# Altium PCB DAQ_PCB.PcbDoc
Units mil, origin at the board's own origin, x right, y up, seen from the top; angles counter-clockwise.
Board outline 5500 x 3700 mil, 2 copper layers (Top Layer, Bottom Layer); 16 components, 53 nets, 188 pads, 11 vias.
Unrouted connection lines stored in the file: 1.
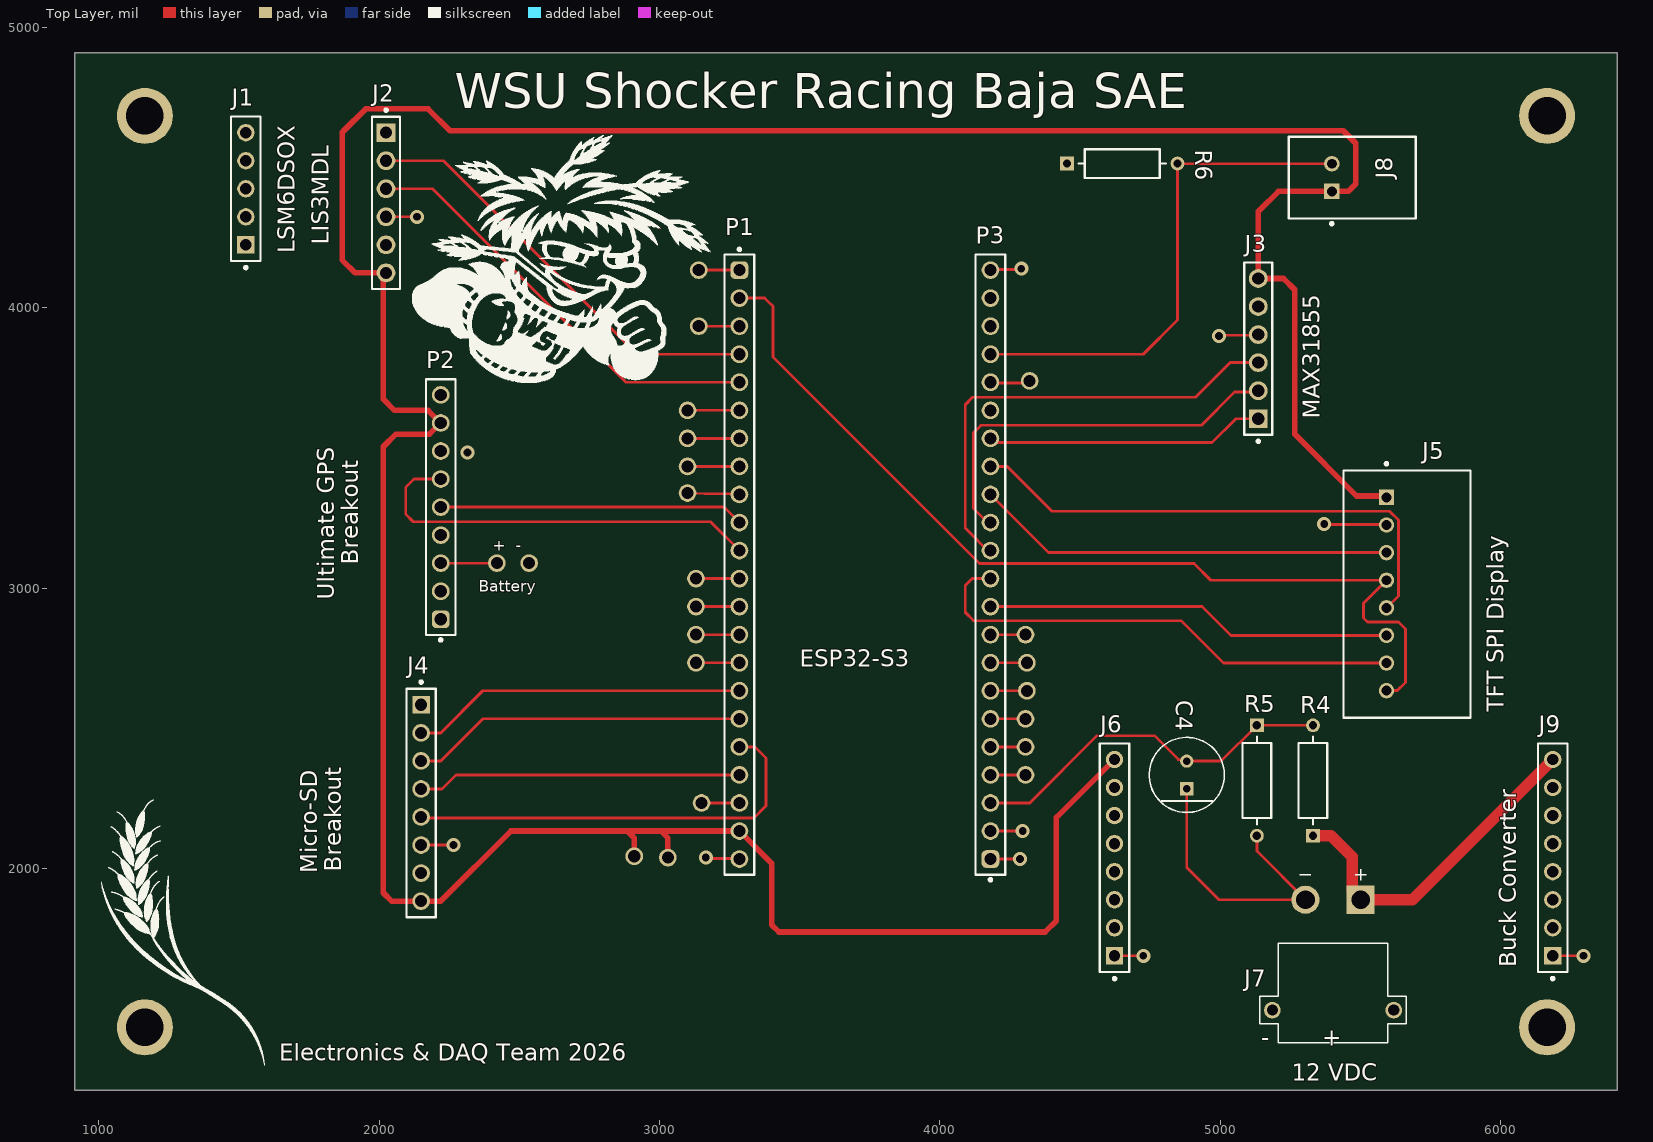
[diagram p0: Top Layer view]
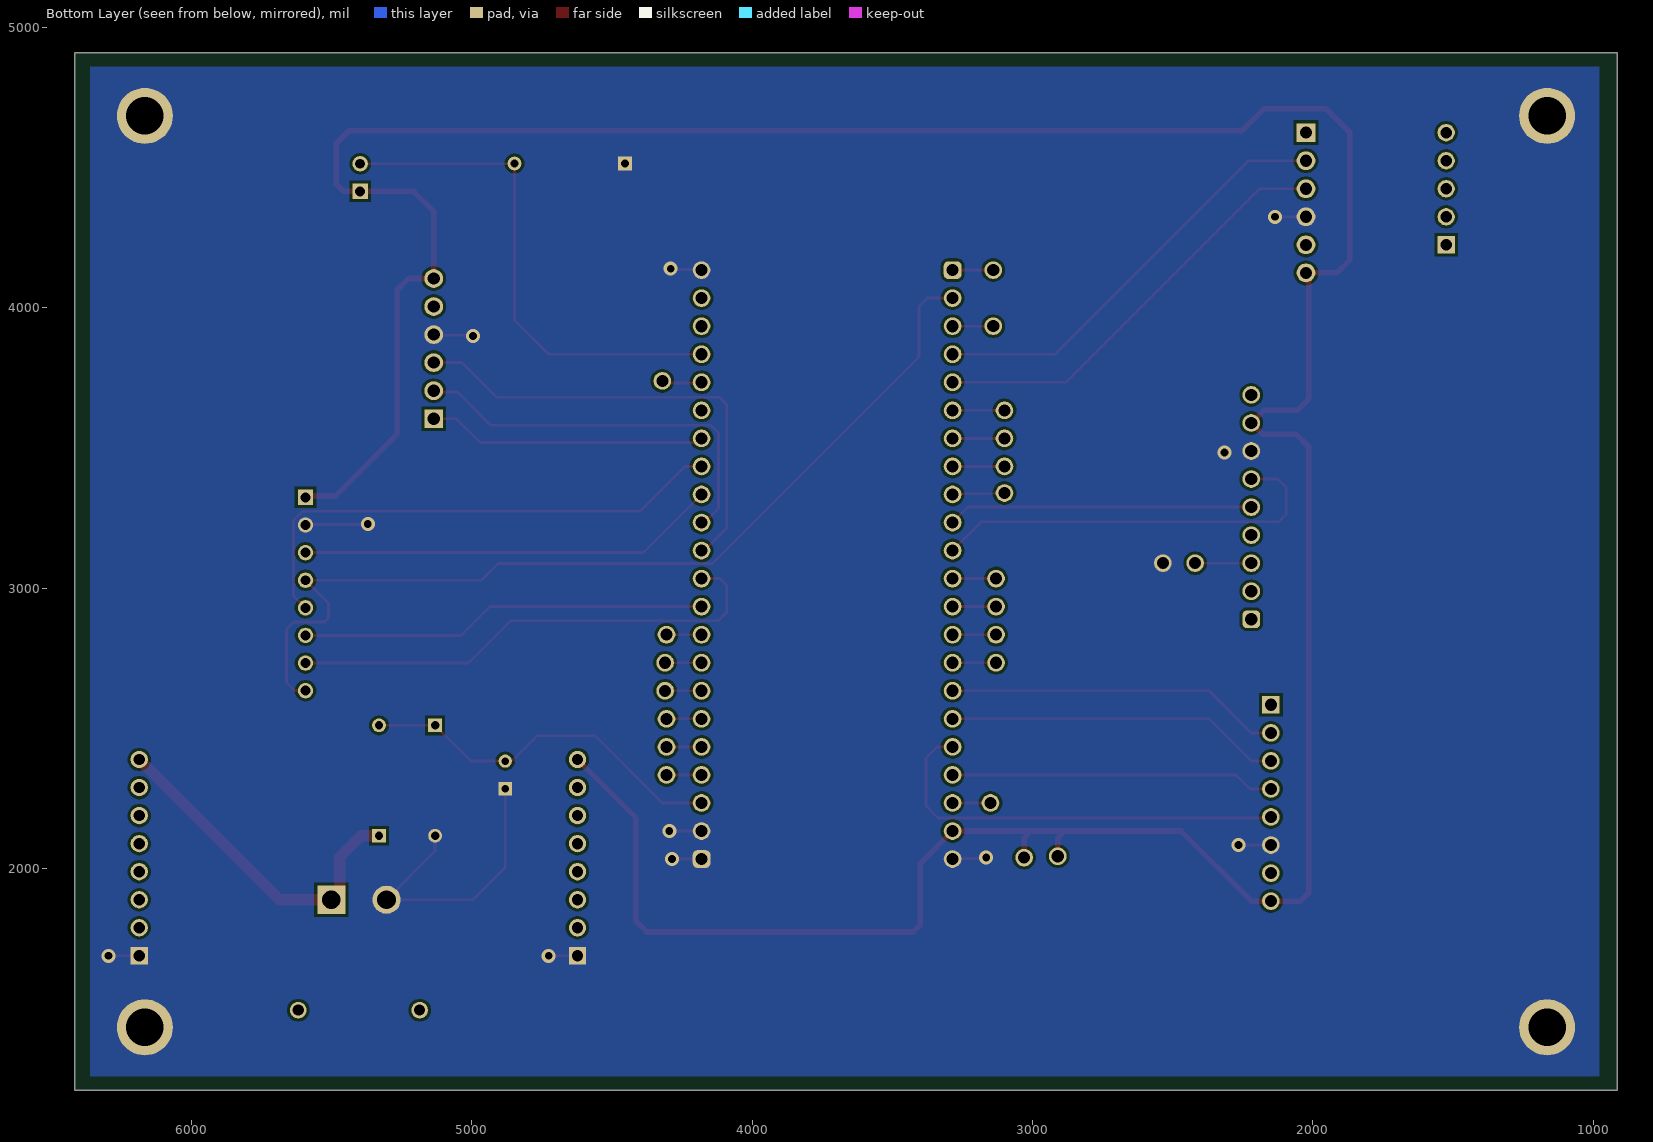
[diagram p1: Bottom Layer view, seen from below]
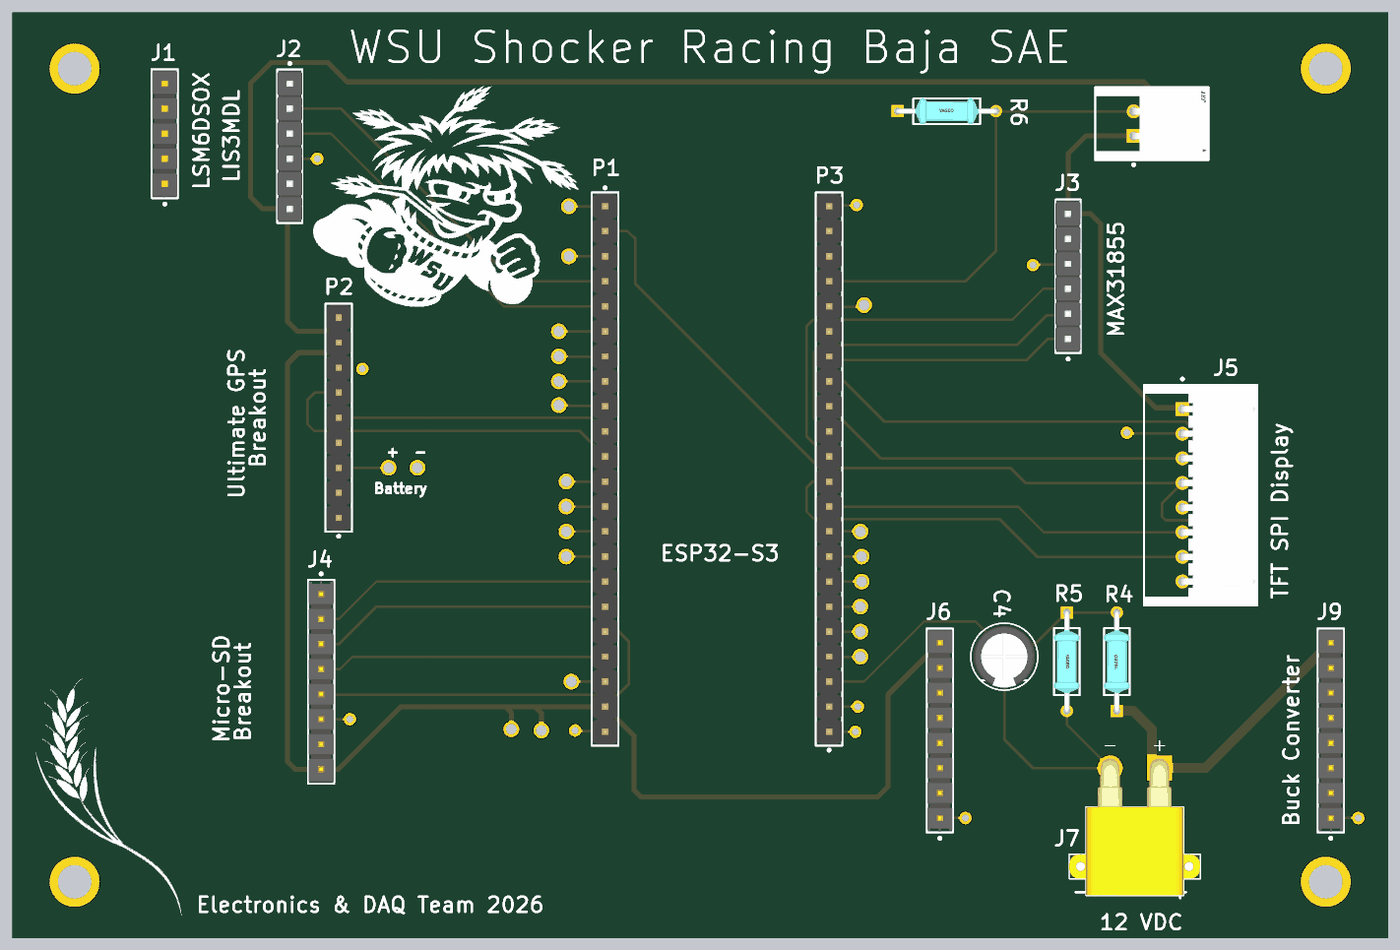
[diagram p2: 3D render of the assembled board from above, using the file's embedded part models]

## Layer stack, top to bottom
Top Solder: solder mask 0.4, Solder Resist, Dk 3.5
Top Layer: signal copper 1.4
Dielectric 1: dielectric 12.6, FR-4, Dk 4.8
Bottom Layer: signal copper 1.4
Bottom Solder: solder mask 0.4, Solder Resist, Dk 3.5

## Board outline
915,1210 6415,1210 6415,4910 915,4910

## Design rules (kind name [scope] priority, off if disabled: settings)
Clearance [All] p1: gap=10 ignorepadtopadclearanceinfootprint=FALSE
HoleSize [All] p1: absolutevalues=TRUE maxlimit=150 minlimit=1 maxpercent=80.000 minpercent=20.000
PolygonConnect [All] p1: connectstyle=Direct reliefconductorwidth=10 reliefentries=4 polygonreliefangle="90 Angle" airgapwidth=10
RoutingVias [All] p1: holewidth=28 width=50 viastyle="Through Hole" minholewidth=28 minwidth=50 maxholewidth=28 maxwidth=50
SolderMaskExpansion [All] p1: expansion=4 istentingtop=FALSE
SupplyNets "Schematic Supply Nets_5" [InNet('VBAT')] p1: voltage=0.000
SupplyNets "Schematic Supply Nets_4" [InNet('3.3V')] p2: voltage=0.000
SupplyNets "Schematic Supply Nets_3" [InNet('GND')] p3: voltage=0.000
SupplyNets "Schematic Supply Nets_2" [InNet('5V')] p4: voltage=0.000
SupplyNets "Schematic Supply Nets_1" [InNet('LED')] p5: voltage=0.000
SupplyNets "Schematic Supply Nets" [InNet('VIN')] p6: voltage=0.000
Width [All] p1: maxlimit=50 minlimit=10 preferedwidth=10 bottomlayer_maxwidth=10 minimp=50.000000 maximp=50.000000 favimp=50.000000
29 further rules are at their usual default settings.

## Classes and differential pairs
component class DAQ_Schematic_V1: C4 J1 J2 J3 J4 J5 J6 J7 J8 J9 R4 R5 R6
component class "Adafruit Ultimate GPS": B1 D2 FB1 FID1 FID2 LED1 R2 U1 U$8 U$9

## Components (designator, comment, footprint, x,y, rotation, side; value= is the part's Value field where it differs from the comment)
C4 "ECA1EHG101I" FP-RAD-TH-D_6_3_0_5-L_11-MFG 4880,2335 r90 top
J1 "TSW-105-22-G-S" FP-TSW-105-22-G-S-MFG 1525,4425 r90 top
J2 "2211S-06G" FP-2211S-06G-MFG 2025,4375 r270 top
J3 "2211S-06G" FP-2211S-06G-MFG 5135,3855 r90 top
J4 "TSW-108-08-G-S" FP-TSW-108-08-G-S-MFG#1 2150,2235 r270 top
J5 "S8B-XH-A-1(LF)(SN)" FP-S8B-XH-A-1_LF_SN-MFG 5665,2980 r90 top
J6 "TSW-108-08-G-S" FP-TSW-108-08-G-S-MFG#2 4622.5,2040 r90 top
J7 "XT30PW-M" AMASS_XT30PW-M 5401.57,1496.3 r180 top
J8 "S2B-XH-A-1(LF)(SN)" FP-S2B-XH-A-1_LF_SN-MFG 5470,4465 r270 top
J9 "TSW-108-08-G-S" FP-TSW-108-08-G-S-MFG#2 6185,2040 r90 top
P1 "61302211121" 61302211121 3285,3085 r270 top
P2 "61300911121" 61300911121 2220,3290 r90 top
P3 "61302211121" 61302211121 4180,3085 r90 top
R4 "MF0207FTE52-10K" FP-MF0207-MFG 5330,2315 r90 top
R5 "MF0207FTE52-10K" FP-MF0207-MFG 5130,2315 r270 top
R6 "MF0207FTE52-10K" FP-MF0207-MFG 4650,4515 r0 top

## Footprints (in the part's own frame and the unit in brackets; to place one, negate y for a bottom-side part, rotate by r counter-clockwise, add the part's x,y. Pads: shape width x height; smd on the part's side, far side on the other; paste and mask are expansions set on the pad)
61300911121 [mm] "Pin Header, pitch 2.54 mm, THT, Vertical, single row, 9p"
  rrect50% 1.6x1.6 hole 1.1: 1(-10.16,0)
  round 1.6 hole 1.1: 2(-7.62,0) 3(-5.08,0) 4(-2.54,0) 5(0,0) 6(2.54,0) 7(5.08,0) 8(7.62,0) 9(10.16,0)
  silkscreen extent -12.15,-1.35 11.58,1.35, body extent -11.43,-1.27 11.43,1.27, height 8.57
61302211121 [mm] "Pin Header, pitch 2.54 mm, THT, Vertical, single row, 22p"
  rrect50% 1.6x1.6 hole 1.1: 1(-26.67,0)
  round 1.6 hole 1.1: 2(-24.13,0) 3(-21.59,0) 4(-19.05,0) 5(-16.51,0) 6(-13.97,0) 7(-11.43,0) 8(-8.89,0) 9(-6.35,0) 10(-3.81,0) 11(-1.27,0) 12(1.27,0) 13(3.81,0) 14(6.35,0) 15(8.89,0) 16(11.43,0) 17(13.97,0) 18(16.51,0) 19(19.05,0) 20(21.59,0) 21(24.13,0) 22(26.67,0)
  silkscreen extent -28.66,-1.35 28.09,1.35, body extent -27.94,-1.27 27.94,1.27, height 8.57
AMASS_XT30PW-M [mm]
  round 2.55 hole 1.7: N(2.5,-10)
  rect 2.55x2.55 / inner round 2.55 / far side rect 2.55x2.55 hole 1.7: P(-2.5,-10)
  round 1.508 hole 1: S1(5.5,0) S2(-5.5,0)
  silkscreen extent -6.65,-12.75 6.65,2.95, body extent -6.65,-11 6.65,2.95, height 5
FP-2211S-06G-MFG [mm]
  rect 1.7x1.7 hole 1.1 paste-2539.97 mask+0: 1(-6.35,0)
  round 1.7 hole 1.1 paste-2539.97 mask+0: 2(-3.81,0) 3(-1.27,0) 4(1.27,0) 5(3.81,0) 6(6.35,0)
  silkscreen extent -8.52,-1.27 7.8,1.27, body extent -7.62,-1.27 7.62,1.27, height 8.74
FP-MF0207-MFG [mm]
  rect 1.25x1.25 hole 0.75 paste-2539.97 mask+0: 1(-5,0)
  round 1.25 hole 0.75 paste-2539.97 mask+0: 2(5,0)
  silkscreen extent -3.98,-1.3 3.98,1.3, body extent -5.72,-1.4 5.72,1.4, height 0.25
FP-RAD-TH-D_6_3_0_5-L_11-MFG [mm]
  rect 1.2x1.2 hole 0.7 paste-2539.97 mask+0: 1(-1.25,0)
  round 1.2 hole 0.7 paste-2539.97 mask+0: 2(1.25,0)
  silkscreen extent -3.4,-3.4 3.4,3.4, body extent -3.5,-3.5 3.5,3.5, height 0.25
FP-S2B-XH-A-1_LF_SN-MFG [mm]
  rect 1.4x1.4 hole 0.9 paste-2539.97 mask+0: 1(1.25,-1.85)
  round 1.4 hole 0.9 paste-2539.97 mask+0: 2(-1.25,-1.85)
  silkscreen extent -3.7,-5.75 4.3,5.75, body extent -3.8,-5.85 3.8,5.85, height 0.25
FP-S8B-XH-A-1_LF_SN-MFG [mm]
  rect 1.4x1.4 hole 0.9 paste-2539.97 mask+0: 1(8.75,1.85)
  round 1.4 hole 0.9 paste-2539.97 mask+0: 2(6.25,1.85) 3(3.75,1.85) 4(1.25,1.85) 5(-1.25,1.85) 6(-3.75,1.85) 7(-6.25,1.85) 8(-8.75,1.85)
  silkscreen extent -11.2,-5.75 11.92,5.75, body extent -11.3,-5.85 11.3,5.85, height 0.25
FP-TSW-105-22-G-S-MFG [mm]
  rect 1.57x1.57 hole 1.02 paste-2539.97 mask+0: 1(-5.08,0)
  round 1.57 hole 1.02 paste-2539.97 mask+0: 2(-2.54,0) 3(0,0) 4(2.54,0) 5(5.08,0)
  silkscreen extent -7.26,-1.34 6.54,1.34, body extent -6.64,-1.44 6.64,1.44, height 0.25
FP-TSW-108-08-G-S-MFG#1 [mm]
  rect 1.6x1.6 hole 1.1 paste-2539.97 mask+0: 1(-8.89,0)
  round 1.6 hole 1.1 paste-2539.97 mask+0: 2(-6.35,0) 3(-3.81,0) 4(-1.27,0) 5(1.27,0) 6(3.81,0) 7(6.35,0) 8(8.89,0)
  silkscreen extent -11.07,-1.34 10.35,1.34, body extent -10.45,-1.44 10.45,1.44, height 0.25
FP-TSW-108-08-G-S-MFG#2 [mm]
  rect 1.57x1.57 hole 1.02 paste-2539.97 mask+0: 1(-8.89,0)
  round 1.57 hole 1.02 paste-2539.97 mask+0: 2(-6.35,0) 3(-3.81,0) 4(-1.27,0) 5(1.27,0) 6(3.81,0) 7(6.35,0) 8(8.89,0)
  silkscreen extent -11.07,-1.34 10.35,1.34, body extent -10.45,-1.44 10.45,1.44, height 0.25

## Part data
C4: library part CMP-05427-000141-1, "Aluminum Electrolytic Capacitors (Radial Lead Type) AEC-Q200 Qualified 100uF ±20% 25V", Capacitance=100uF, Case/Package=Radial, Max Operating Temperature=105°C, Min Operating Temperature=-55°C, Package Quantity=2000, Ripple Current=130mA, Tolerance=20%, Voltage Rating=25V, Construction=RADIAL, Contact Plating=Tin, Diameter=6.3mm, Height=11.2mm, Height - Seated (Max)=0.48inch, Lead Diameter=0.5mm, Lead Pitch=2.5mm, Lead/Base Style=Straight, Length=11.2mm, Life (Hours)=1000Hour, Mount="Through Hole", Packaging="Ammo Pack", Radiation Hardening=No, RoHS Compliant=Yes, Series=NHG, Termination=Radial, Voltage Rating (DC)=25V, Width=6.3mm
J1: library part CMP-02766-000105-1, "CONN HEADER VERT 5POS 2.54MM", Contact Material=Bronze, Contact Plating=Gold, Gender=Male, Mount="Through Hole", Number Of Contacts=5, Number of Rows=1, REACH SVHC="No SVHC", Termination="Through Hole"
J2 J3: library part CMP-12414-000005-1, "Board-To-Board Connector, 2.54 mm, 6 Contacts, Header, 2211S Series, Through Hole, 1 Rows", Flammability Rating="UL94 V-0", Insulation Resistance=1GR, Contact Material="Copper Alloy", Contact Plating=Gold, Gender=Male, Height=0.47inch, Length=0.59inch, Mount="Through Hole", Number Of Contacts=6, Number of Rows=1, REACH SVHC="No SVHC", RoHS Compliant=No, Termination="Through Hole", Weight=0.11lb, Width=0.12inch
J4 J6 J9: library part CMP-02766-000001-1, "CONN HEADER VERT 8POS 2.54MM", Manufacturer=Samtec, Temperature="-55°C to +125°C", Temperature Range High=+125°C, Temperature Range Low=-55°C, Automotive=No, Category=Conn, ComponentLink2Description=Datasheet, ComponentLink2URL=http://suddendocs.samtec.com/catalog_english/tsw_th.pdf, Conn Gender=Male, Conn Orientation=Straight, Contact Material=Gold,Nickel, Device Class L1=Connectors, Device Class L2="Headers and Wire Housings", Device Class L3=unset, Digikey Description="CONN HEADER VERT 8POS 2.54MM", Footprint Url=http://suddendocs.samtec.com/prints/tsw-xxx-xx-x-x-xx-xxx-footprint.pdf, Height=8.71mm, Lead Free=Yes, Manufacturer Part Number=TSW-108-08-G-S, Mouser Description="TSW - Samtec 2.54mm Pin Header 13.46mm Overall Pin Length 5.08mm Tail", Number Of Contacts=8, Number of Rows=1, Octopart=https://octopart.com/tsw-108-08-g-s-samtec-272653, Package=TSW-108-08-G-S, Pitch=2.54mm, RoHS=TRUE
J5: library part CMP-17439-000621-1, "CONN HEADER R/A 8POS 2.5MM", Flammability Rating="UL94 V-0", Insulation Color=Natural, Max Operating Temperature=85°C, Min Operating Temperature=-25°C, Voltage Rating=250V, Connector Type=Header, Contact Finish - Mating=TIN, Contact Material=Brass, Contact Shape=Square, Contact Type="Male Pin", Fastening Type=Detent, Insulation Material=Nylon, Lead Free="Lead Free", Mount="Through Hole", Number of Positions=8, Number of Rows=1, Packaging=Bulk, Series=XH, Termination=Press-Fit
J7: library part CMP-002-00074-1, "Socket; DC supply; XT30; male; PIN: 2; on PCBs; THT; Colour: yellow", Case/Package=None, Check_prices=https://www.snapeda.com/parts/XT30PW-M/AMASS/view-part/?ref=eda, Component Type=Standard, Design Item ID=XT30PW-M, MF=AMASS, MP=XT30PW-M, Pins=2, SnapEDA_Link=https://www.snapeda.com/parts/XT30PW-M/AMASS/view-part/?ref=snap, Source=XT30PW-M.SchLib
J8: library part CMP-17439-000260-1, "CONN HEADER R/A 2POS 2.5MM", Flammability Rating="UL94 V-0", Insulation Color=Natural, Max Operating Temperature=85°C, Min Operating Temperature=-25°C, Voltage Rating=250V, Connector Type=Header, Contact Finish - Mating=TIN, Contact Material=Brass, Contact Shape=Square, Contact Type="Male Pin", Fastening Type=Detent, Insulation Material=Nylon, Lead Free="Lead Free", Mount="Through Hole", Number of Positions=2, Number of Rows=1, Packaging=Bulk, Series=XH, Termination=Press-Fit
P1 P3: library part CMP-1502-01106-4, "THT Vertical Pin Header WR-PHD, Pitch 2.54 mm, Single Row, 22 pins", Color=Black, Contact Resistance=20mΩ, Current Rating=3A, Operating Supply Voltage=250V, Connector Type="Male Pin", Contact Material=Copper, Contact Mating Length=5.9944mm, Contact Plating=Gold, Gender=Male, Lead Pitch=2.54mm, Mount="Through Hole", Number Of Contacts=22, Number of Pins=22, Number of Positions=22, Number of Rows=1, Orientation=Vertical, Packaging=Bulk, Pitch=2.54mm, RoHS=Compliant, Termination=Solder
P2: library part CMP-1502-01080-4, "THT Vertical Pin Header WR-PHD, Pitch 2.54 mm, Single Row, 9 pins", Color=Black, Contact Resistance=20mΩ, Current Rating=3A, Operating Supply Voltage=250V, Connector Type="Male Pin", Contact Material=Copper, Contact Mating Length=5.9944mm, Contact Plating=Gold, Gender=Male, Lead Pitch=2.54mm, Mount="Through Hole", Number Of Contacts=9, Number of Pins=9, Number of Positions=9, Number of Rows=1, Orientation=Vertical, Packaging=Bulk, Pitch=2.54mm, RoHS=Compliant, Termination=Solder
R4 R5 R6: library part CMP-03413-000006-1, "RES 10K OHM 1% 0.6W AXIAL", Case/Package=Conformal, Max Operating Temperature=155°C, Min Operating Temperature=-55°C, Resistance=10kR, Resistor Type="Metal Film", Temperature Coefficient=50ppm/°C, Tolerance=1%, Construction=Cylindrical, Contact Plating=Tin, Diameter=2.4mm, Lead Free="Lead Free", Length=6.3mm, Military Standard=Not, Mount="Through Hole", Packaging="Ammo Pack", Radiation Hardening=No, RoHS Compliant=Yes, Termination=Axial

## Free pads (board coordinates)
  round 2.5 on Mech11: 1(3222.32,1969.25) 1(3222.32,1969.25) 1(3222.32,4189.25) 1(3222.32,4189.25) 1(3342.32,1969.25) 1(3342.32,1969.25) 1(3342.32,4189.25) 1(3342.32,4189.25) 1(4122.32,4189.25) 1(4122.32,4189.25) 1(4242.32,1969.25) 1(4242.32,1969.25) 1(4242.32,4189.25) 1(4242.32,4189.25)
  round 2.5 on Mech2: 1(3232.32,1735.55) 1(3232.32,1735.55) 1(3232.32,1735.55) 1(3232.32,1735.55) 1(3232.32,4171.18) 1(3232.32,4171.18) 1(3232.32,4171.18) 1(3232.32,4171.18) 1(3252,1715.86) 1(3252,1715.86) 1(3252,1715.86) 1(3252,1715.86) 1(3252,4190.86) 1(3252,4190.86) 1(3252,4190.86) 1(3252,4190.86) 1(4212.63,1715.86) 1(4212.63,1715.86) 1(4212.63,1715.86) 1(4212.63,1715.86) 1(4212.63,4190.86) 1(4212.63,4190.86) 1(4212.63,4190.86) 1(4212.63,4190.86) 1(4232.32,1735.55) 1(4232.32,1735.55) 1(4232.32,1735.55) 1(4232.32,1735.55) 1(4232.32,4171.18) 1(4232.32,4171.18) 1(4232.32,4171.18) 1(4232.32,4171.18)
  round 200 hole 134: 2(1165,1435) 2(1165,4685) 2(6165,1435) 2(6165,4685)
  round 63 hole 43: 6(2420,3090) 6(2535,3090) 6(2910,2045) 6(3030,2040) 6(3100,3340) 6(3100,3435) 6(3100,3535) 6(3100,3635) 6(3130,2735) 6(3130,2835) 6(3130,2935) 6(3130,3035) 6(3140,3935) 6(3140,4135) 6(3150,2235) 6(4305,2335) 6(4305,2435) 6(4305,2535) 6(4305,2835) 6(4310,2635) 6(4310,2735) 6(4320,3740)

## Via types
v1: diameter 50, hole 28, Top Layer to Bottom Layer, 11 vias

## Nets (pads, with @x,y where several pads share a name; then routed paths per layer and width w, separated by ;. In a path a pad name is that pad's centre, name@x,y a point inside that pad or via, vN(x,y) a via of type N, cw(c..) or ccw(c..) an arc to the next point about the centre after c; other vN are vias at no path point)
1PPS: 
3.3V: 
5V: J2.6 J3.6 J4.8 J5.1 J6.8 J8.1 P1.21 P2.8 pad.6@2910,2045 pad.6@3030,2040 | length 12385.4
  Top Layer w20: pad.6@2910,2045 2910,2110 2885,2135 ; pad.6@3030,2040 3030,2110 3005,2135 ; J6.8@4622,2390 4415,2183 4415,1815 4375,1775 3425.86,1775 3400,1800.86 3400,2020 P1.21 3005,2135 ; J5.1 5587.12,3329.54 5485.46,3329.54 5265,3550 5265,4065 5225,4105 J3.6 5135,4344.14 5140.86,4350 5206.65,4415.79 5455.79,4415.79 5482.52,4442.52 5482.52,4587.48 5438.19,4631.81 2253.19,4631.81 2175,4710 1952.5,4710 1874.31,4631.81 1868.45,4625.95 1868.45,4171.55 1915,4125 J2.6 2015,4115 2015,3675 2055,3635 2175,3635 P2.8 2180,3550 2060,3550 2015,3505 2015,1915 2045,1885 J4.8 2220,1885 2470,2135 2885,2135 ; 2885,2135 3005,2135
CLK: J4.5 P1.18 | length 1530.8
  Top Layer w10: J4.5 2153.23,2181.77 3336.77,2181.77 3380,2225 3380,2395 3340,2435 P1.18
CLK_1: J3.1 P3.16 | length 1016.8
  Top Layer w10: P3.16@4180,3525 4185,3520 4970,3520 5055,3605 J3.1@5159.57,3605
CS: J4.2 P1.16 | length 1197.1
  Top Layer w10: J4.2 2220,2485 2370,2635 P1.16
CS_1: J3.2 P3.13 | length 1429.9
  Top Layer w10: P3.13@4180,3225 4175,3230 4120,3285 4120,3555 4146.5,3581.5 4931.5,3581.5 5050,3700 J3.2@5135,3700
CS_2: J5.3 P3.14 | length 1498.1
  Top Layer w10: P3.14 4387.36,3127.64 J5.3
DC/RS: J5.5 P3.15 | length 1864.5
  Top Layer w10: P3.15 4240,3435 4400,3275 5603.42,3275 5634.72,3243.69 5634.72,2973.35 J5.5
DI: J4.3 P1.17 | length 1197.1
  Top Layer w10: J4.3 2220,2385 2370,2535 P1.17
DO: J4.4 P1.19 | length 1155.7
  Top Layer w10: J4.4 2225,2285 2275,2335 P1.19
DO_1: J3.3 P3.12 | length 1685.6
  Top Layer w10: P3.12@4180,3125 4090,3215 4090,3655 4116.5,3681.5 4911.5,3681.5 5035,3805 J3.3@5146.16,3805
ENABLE: 
FIX: 
GND: C4.1 J2.4 J3.4 J4.6 J5.2 J6.1 J7.N J9.1 P1.22 P2.7 P3.1 P3.2 P3.22 pad.2 pad.6@2535,3090 R5.2 R6.1 | length 2312.3
  Top Layer w10: J2.4 v1(2135,4325) ; J4.6 v1(2265,2085) ; v1(3165,2040) 3167.5,2037.5 3282.5,2037.5 P1.22 ; P3.1 v1(4285,2035) ; P3.2 v1(4295,2135) ; P3.22@4180,4125 4192.5,4137.5 4287.5,4137.5 v1(4290,4140) ; J6.1 v1(4725,1690) ; C4.1 4880,2005 4995,1890 J7.N 5130,2063.15 R5.2 ; v1(4995,3900) 4997.5,3902.5 5131.67,3902.5 J3.4@5134.17,3900 ; v1(5370,3230) 5371.97,3228.03 5590.2,3228.03 J5.2 ; J9.1 v1(6295,1690)
  other v1: 2315,3485
GPIO0: P3.9 pad.6@4305,2835 | length 125
  Top Layer w10: P3.9 4290,2835 pad.6@4305,2835
GPIO1: J8.2 P3.19 R6.2 | length 1826.1
  Top Layer w10: P3.19 4725,3835 4846.85,3956.85 R6.2 4847.64,4514.21 J8.2
GPIO2: P3.18 pad.6@4320,3740 | length 144.6
  Top Layer w10: P3.18@4180,3725 4187.5,3732.5 4302.5,3732.5 pad.6@4320,3740
GPIO3: P1.13 pad.6@3130,2935 | length 155
  Top Layer w10: pad.6@3130,2935 P1.13
GPIO6: P1.6 pad.6@3100,3635 | length 185
  Top Layer w10: pad.6@3100,3635 P1.6
GPIO7: P1.7 pad.6@3100,3535 | length 185
  Top Layer w10: pad.6@3100,3535 P1.7
GPIO8: P1.12 pad.6@3130,3035 | length 155
  Top Layer w10: pad.6@3130,3035 P1.12
GPIO9: P1.15 pad.6@3130,2735 | length 155
  Top Layer w10: pad.6@3130,2735 P1.15
GPIO14: P1.20 pad.6@3150,2235 | length 135
  Top Layer w10: pad.6@3150,2235 P1.20
GPIO15: P1.8 pad.6@3100,3435 | length 185
  Top Layer w10: pad.6@3100,3435 P1.8
GPIO16: P1.9 pad.6@3100,3340 | length 186.1
  Top Layer w10: pad.6@3100,3340 3162.5,3337.5 3282.5,3337.5 P1.9
GPIO17: P1.10 P2.5 | length 1087.8
  Top Layer w10: P2.5 3230,3290 P1.10
GPIO18: P1.11 P2.6 | length 1476.3
  Top Layer w10: P2.6 2125,3390 2095,3360 2095,3265 2122.16,3237.84 3182.16,3237.84 P1.11
GPIO19: C4.2 P3.3 R4.2 R5.1 | length 1339.9
  Top Layer w10: P3.3 4320,2235 4560,2475 4765,2475 4850.58,2389.42 4874.8,2389.42 C4.2 5002.36,2384.21 R5.1 R4.2
GPIO20: P3.4 pad.6@4305,2335 | length 125
  Top Layer w10: P3.4 4295,2335 pad.6@4305,2335
GPIO21: P3.5 pad.6@4305,2435 | length 125
  Top Layer w10: P3.5 4295,2435 pad.6@4305,2435
GPIO35: J5.6 P3.10 | length 1454.7
  Top Layer w10: P3.10 4935,2935 5037.64,2832.36 J5.6
GPIO36: J5.7 P3.11 | length 1772.5
  Top Layer w10: P3.11 4115,3035 4090,3010 4090,2915 4120,2885 4860,2885 5011.06,2733.94 J5.7
GPIO42: P3.17
GPIO45: P3.8 pad.6@4310,2735 | length 130
  Top Layer w10: P3.8 4295,2735 pad.6@4310,2735
GPIO46: P1.14 pad.6@3130,2835 | length 155
  Top Layer w10: pad.6@3130,2835 P1.14
GPIO47: P3.6 pad.6@4305,2535 | length 125
  Top Layer w10: P3.6 4295,2535 pad.6@4305,2535
GPIO48: P3.7 pad.6@4310,2635 | length 130
  Top Layer w10: P3.7 4295,2635 pad.6@4310,2635
LED: J5.4 J5.8 P1.1 P1.2 pad.6@3140,4135 | length 3579.8
  Top Layer w10: pad.6@3140,4135 P1.1 ; P1.2 3375,4035 3397.93,4012.07 3399.14,4012.07 3405,4006.21 3405,3825 4141.5,3088.5 4906.5,3088.5 4965.79,3029.21 5546.14,3029.21 J5.4 5510,2947.05 5510,2895 5525,2880 5635,2880 5660,2855 5660,2665 5630.51,2635.51 J5.8
NetB1_+$1,2: 
NetFB1_1: 
NetJ7_P: J7.P J9.8 R4.1 | length 1228.6
  Top Layer w40: R4.1 5334.61,2118.15 5394.81,2118.15 5470,2042.96 5470,1920 J7.P 5685,1890 J9.8
NetLED1_C: 
NetU1_P$11: 
RST: P1.3 pad.6@3140,3935 | length 145
  Top Layer w10: pad.6@3140,3935 P1.3
RX_0: P3.20
RX_3V: 
SCL: J2.3 P1.5 | length 1571.3
  Top Layer w10: J2.3@2025,4450.46 J2.3 2190,4425 2880,3735 P1.5
SDA: J2.2 P1.4 | length 1531.1
  Top Layer w10: J2.2@2039.7,4525 2230,4525 2920,3835 P1.4
TX_0: P3.21
VBACKUP: 
VBAT: P2.3 pad.6@2420,3090 | length 200
  Top Layer w10: P2.3 pad.6@2420,3090
VIN: 
pads on no net: J1.1 J1.2 J1.3 J1.4 J1.5 J2.1 J2.5 J3.5 J4.1 J4.7 J6.2 J6.3 J6.4 J6.5 J6.6 J6.7 J7.S1 J7.S2 J9.2 J9.3 J9.4 J9.5 J9.6 J9.7 P2.1 P2.2 P2.4 P2.9

## Polygon pours and split planes (outlines as drawn)
GND on Bottom Layer "GND_L02_P001" (solid, pour order 1): 980,1260 6360,1260 6360,4860 980,4860

## Other copper
Top Layer:
  region: 2527.5,3937.14 2527.5,3935.93 2526.29,3935.93 2526.29,3937.14
  region: 3002.69,4283.51 3003.91,4283.51 3003.91,4282.29 3002.69,4282.29
  region: 2537.23,3924.99 2537.23,3926.2 2538.44,3926.2 2538.44,3924.99
  region: 2556.67,3924.99 2555.46,3924.99 2555.46,3926.2 2556.67,3926.2

## Silkscreen, mask and mechanical layers (free items; w line width, h text height)
Top Overlay:
  drawing of 19 lines, arcs and shapes, not listed
  text "WSU Shocker Racing Baja SAE" at 2269.29,4711.65 h125
  text "LIS3MDL" at 1820,4225 h60 r90
  text "LSM6DSOX" at 1700,4195 h60 r90
  text "MAX31855" at 5355,3605 h60 r90
  text "+  -" at 2405,3135 h40
  text "Breakout" at 1925,3085 h60 r90
  text "Battery" at 2355,2988.33 h40
  text "Ultimate GPS" at 1840,2960 h60 r90
  text "ESP32-S3" at 3500,2720 h60
  text "TFT SPI Display" at 6010.01,2560 h60 r90
  text "Breakout" at 1865,1990 h60 r90
  text "Micro-SD" at 1780,1985 h60 r90
  text "Buck Converter" at 6055,1650 h60 r90
  text "-       +" at 5145,1370 h60
  text "Electronics & DAQ Team 2026" at 1645,1315 h60
  text "12 VDC" at 5255,1245 h60
Dimensions:
  lines w5: 3232.32,1735.55 ccw(c3252,1735.55) 3252,1715.86 ; 3232.32,1735.55 ccw(c3252,1735.55) 3252,1715.86 ; 3232.32,1735.55 3232.32,4171.18 ; 3232.32,1735.55 3232.32,4171.18 ; 3232.32,4171.18 cw(c3252,4171.18) 3252,4190.86 ; 3232.32,4171.18 cw(c3252,4171.18) 3252,4190.86 ; 3252,1715.86 4212.63,1715.86 ; 3252,1715.86 4212.63,1715.86 ; 3252,4190.86 4212.63,4190.86 ; 3252,4190.86 4212.63,4190.86 ; 4212.63,1715.86 ccw(c4212.63,1735.55) 4232.32,1735.55 ; 4212.63,1715.86 ccw(c4212.63,1735.55) 4232.32,1735.55 ; 4212.63,4190.86 cw(c4212.63,4171.18) 4232.32,4171.18 ; 4212.63,4190.86 cw(c4212.63,4171.18) 4232.32,4171.18 ; 4232.32,1735.55 4232.32,4171.18 ; 4232.32,1735.55 4232.32,4171.18
Top Glue Points:
  lines w5: 3222.32,1969.25 3342.32,1969.25 3342.32,4189.25 3222.32,4189.25 3222.32,1969.25 ; 4122.32,1969.25 4242.32,1969.25 4242.32,4189.25 4122.32,4189.25 4122.32,1969.25
Bottom Glue Points:
  lines w5: 3262.32,2029.25 ccw(c3282.32,2029.25) 3302.32,2029.25 ccw(c3282.32,2029.25) 3262.32,2029.25 ; 3262.32,2129.25 ccw(c3282.32,2129.25) 3302.32,2129.25 ccw(c3282.32,2129.25) 3262.32,2129.25 ; 3262.32,2229.25 ccw(c3282.32,2229.25) 3302.32,2229.25 ccw(c3282.32,2229.25) 3262.32,2229.25 ; 3262.32,2329.25 ccw(c3282.32,2329.25) 3302.32,2329.25 ccw(c3282.32,2329.25) 3262.32,2329.25 ; 3262.32,2429.25 ccw(c3282.32,2429.25) 3302.32,2429.25 ccw(c3282.32,2429.25) 3262.32,2429.25 ; 3262.32,2529.25 ccw(c3282.32,2529.25) 3302.32,2529.25 ccw(c3282.32,2529.25) 3262.32,2529.25 ; 3262.32,2629.25 ccw(c3282.32,2629.25) 3302.32,2629.25 ccw(c3282.32,2629.25) 3262.32,2629.25 ; 3262.32,2729.25 cw(c3282.32,2729.25) 3302.32,2729.25 cw(c3282.32,2729.25) 3262.32,2729.25 ; 3262.32,2829.25 cw(c3282.32,2829.25) 3302.32,2829.25 cw(c3282.32,2829.25) 3262.32,2829.25 ; 3262.32,2929.25 ccw(c3282.32,2929.25) 3302.32,2929.25 ccw(c3282.32,2929.25) 3262.32,2929.25 ; 3262.32,3029.25 ccw(c3282.32,3029.25) 3302.32,3029.25 ccw(c3282.32,3029.25) 3262.32,3029.25 ; 3262.32,3129.25 ccw(c3282.32,3129.25) 3302.32,3129.25 ccw(c3282.32,3129.25) 3262.32,3129.25 ; 3262.32,3229.25 ccw(c3282.32,3229.25) 3302.32,3229.25 ccw(c3282.32,3229.25) 3262.32,3229.25 ; 3262.32,3329.25 ccw(c3282.32,3329.25) 3302.32,3329.25 ccw(c3282.32,3329.25) 3262.32,3329.25 ; 3262.32,3429.25 ccw(c3282.32,3429.25) 3302.32,3429.25 ccw(c3282.32,3429.25) 3262.32,3429.25 ; 3262.32,3529.25 ccw(c3282.32,3529.25) 3302.32,3529.25 ccw(c3282.32,3529.25) 3262.32,3529.25 ; 3262.32,3629.25 ccw(c3282.32,3629.25) 3302.32,3629.25 ccw(c3282.32,3629.25) 3262.32,3629.25 ; 3262.32,3729.25 ccw(c3282.32,3729.25) 3302.32,3729.25 ccw(c3282.32,3729.25) 3262.32,3729.25 ; 3262.32,3829.25 ccw(c3282.32,3829.25) 3302.32,3829.25 ccw(c3282.32,3829.25) 3262.32,3829.25 ; 3262.32,3929.25 cw(c3282.32,3929.25) 3302.32,3929.25 cw(c3282.32,3929.25) 3262.32,3929.25 ; 3262.32,4029.25 cw(c3282.32,4029.25) 3302.32,4029.25 cw(c3282.32,4029.25) 3262.32,4029.25 ; 3262.32,4129.25 cw(c3282.32,4129.25) 3302.32,4129.25 cw(c3282.32,4129.25) 3262.32,4129.25 ; 4162.32,2029.25 ccw(c4182.32,2029.25) 4202.32,2029.25 ccw(c4182.32,2029.25) 4162.32,2029.25 ; 4162.32,2129.25 ccw(c4182.32,2129.25) 4202.32,2129.25 ccw(c4182.32,2129.25) 4162.32,2129.25 ; 4162.32,2229.25 ccw(c4182.32,2229.25) 4202.32,2229.25 ccw(c4182.32,2229.25) 4162.32,2229.25 ; 4162.32,2329.25 ccw(c4182.32,2329.25) 4202.32,2329.25 ccw(c4182.32,2329.25) 4162.32,2329.25 ; 4162.32,2429.25 ccw(c4182.32,2429.25) 4202.32,2429.25 ccw(c4182.32,2429.25) 4162.32,2429.25 ; 4162.32,2529.25 ccw(c4182.32,2529.25) 4202.32,2529.25 ccw(c4182.32,2529.25) 4162.32,2529.25 ; 4162.32,2629.25 ccw(c4182.32,2629.25) 4202.32,2629.25 ccw(c4182.32,2629.25) 4162.32,2629.25 ; 4162.32,2729.25 ccw(c4182.32,2729.25) 4202.32,2729.25 ccw(c4182.32,2729.25) 4162.32,2729.25 ; 4162.32,2829.25 cw(c4182.32,2829.25) 4202.32,2829.25 cw(c4182.32,2829.25) 4162.32,2829.25 ; 4162.32,2929.25 cw(c4182.32,2929.25) 4202.32,2929.25 cw(c4182.32,2929.25) 4162.32,2929.25 ; 4162.32,3029.25 cw(c4182.32,3029.25) 4202.32,3029.25 cw(c4182.32,3029.25) 4162.32,3029.25 ; 4162.32,3129.25 ccw(c4182.32,3129.25) 4202.32,3129.25 ccw(c4182.32,3129.25) 4162.32,3129.25 ; 4162.32,3229.25 ccw(c4182.32,3229.25) 4202.32,3229.25 ccw(c4182.32,3229.25) 4162.32,3229.25 ; 4162.32,3329.25 ccw(c4182.32,3329.25) 4202.32,3329.25 ccw(c4182.32,3329.25) 4162.32,3329.25 ; 4162.32,3429.25 ccw(c4182.32,3429.25) 4202.32,3429.25 ccw(c4182.32,3429.25) 4162.32,3429.25 ; 4162.32,3529.25 ccw(c4182.32,3529.25) 4202.32,3529.25 ccw(c4182.32,3529.25) 4162.32,3529.25 ; 4162.32,3629.25 ccw(c4182.32,3629.25) 4202.32,3629.25 ccw(c4182.32,3629.25) 4162.32,3629.25 ; 4162.32,3729.25 ccw(c4182.32,3729.25) 4202.32,3729.25 ccw(c4182.32,3729.25) 4162.32,3729.25 ; 4162.32,3829.25 ccw(c4182.32,3829.25) 4202.32,3829.25 ccw(c4182.32,3829.25) 4162.32,3829.25 ; 4162.32,3929.25 cw(c4182.32,3929.25) 4202.32,3929.25 cw(c4182.32,3929.25) 4162.32,3929.25 ; 4162.32,4029.25 cw(c4182.32,4029.25) 4202.32,4029.25 cw(c4182.32,4029.25) 4162.32,4029.25 ; 4162.32,4129.25 cw(c4182.32,4129.25) 4202.32,4129.25 cw(c4182.32,4129.25) 4162.32,4129.25
Mechanical 16:
  lines w0.04: 3377.99,1876.39 cw(c3389.8,1876.39) 3401.61,1876.39 cw(c3389.8,1876.39) 3377.99,1876.39 ; 3535.47,1876.39 cw(c3547.28,1876.39) 3559.09,1876.39 cw(c3547.28,1876.39) 3535.47,1876.39 ; 3905.55,1876.39 cw(c3917.36,1876.39) 3929.17,1876.39 cw(c3917.36,1876.39) 3905.55,1876.39 ; 4063.03,1876.39 cw(c4074.84,1876.39) 4086.65,1876.39 cw(c4074.84,1876.39) 4063.03,1876.39

## Dimensions
4622.5,2390 to 6185,2390 on Dimensions
6165,1435 to 6165,4685 on Dimensions
6165,4685 to 6415,4910 on Dimensions
6165,1435 to 6415,1210 on Dimensions
2025,4125 to 1525,4625 on Dimensions
6165,4685 to 6415,4910 on Dimensions
1165,4685 to 915,4910 on Dimensions
6165,1435 to 6415,1210 on Dimensions
915,1210 to 1165,1435 on Dimensions
1165,4685 to 6165,4685 on Dimensions
1165,1435 to 6165,1435 on Dimensions
915,1210 to 6415,1210 on Dimensions